# Altium PCB MolkkyPCB_old.PcbDoc
Units mm, origin at the board's own origin, x right, y up, seen from the top; angles counter-clockwise.
Board outline 29.08 x 26.04 mm, 3 copper layers (Top Layer, Internal Plane 13, Bottom Layer); 22 components, 17 nets, 103 pads, 0 vias.
Unrouted connection lines stored in the file: 45.
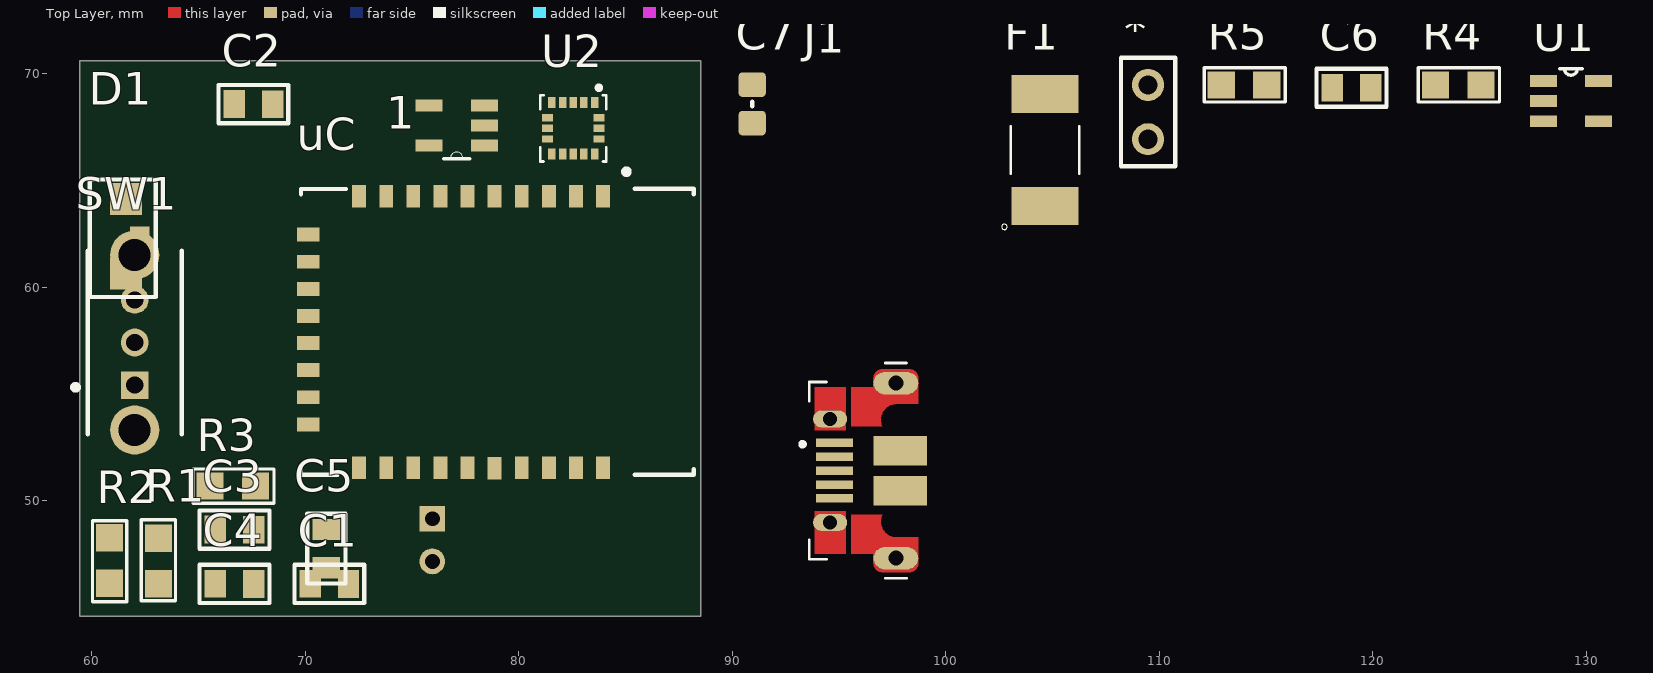
[diagram p0: Top Layer view]
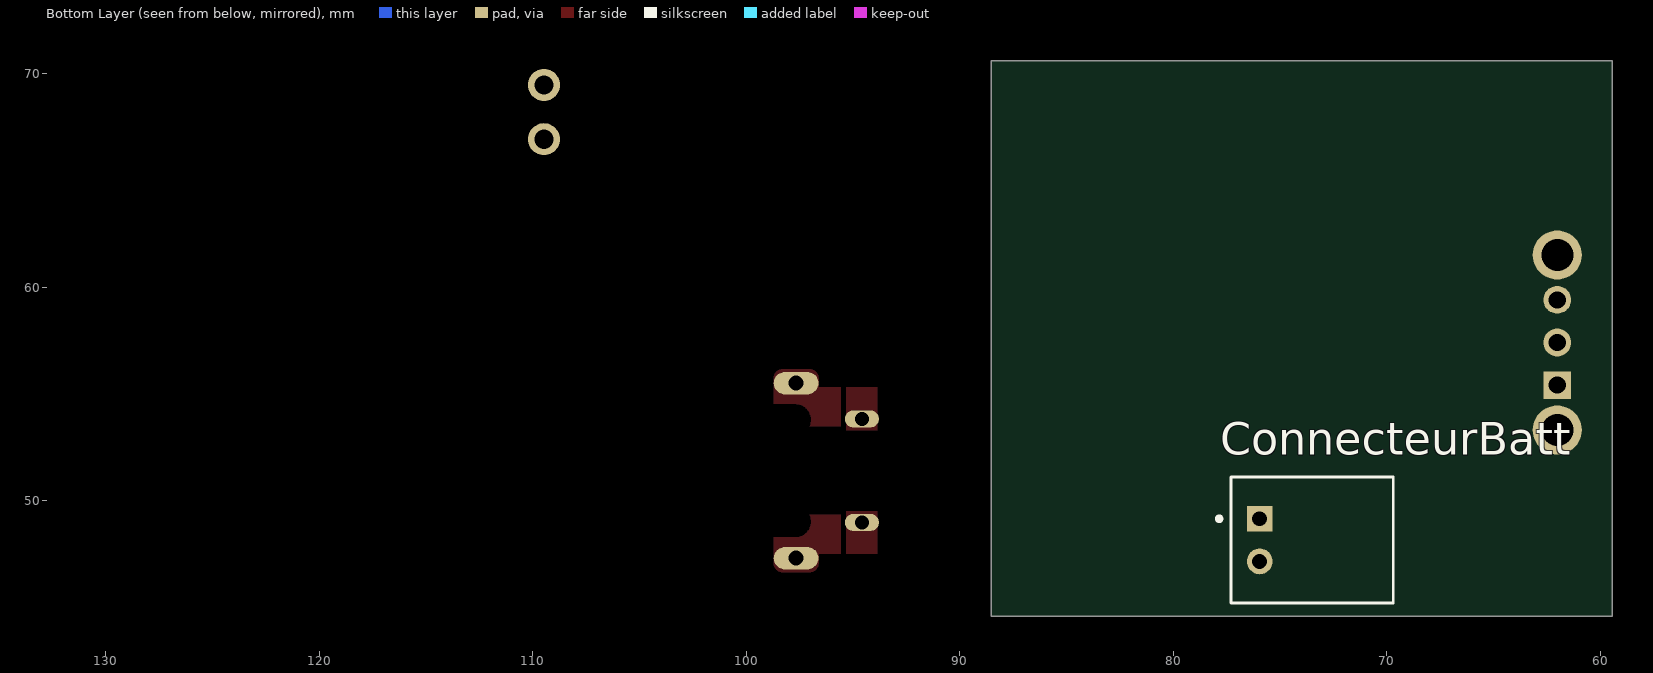
[diagram p1: Bottom Layer view, seen from below]
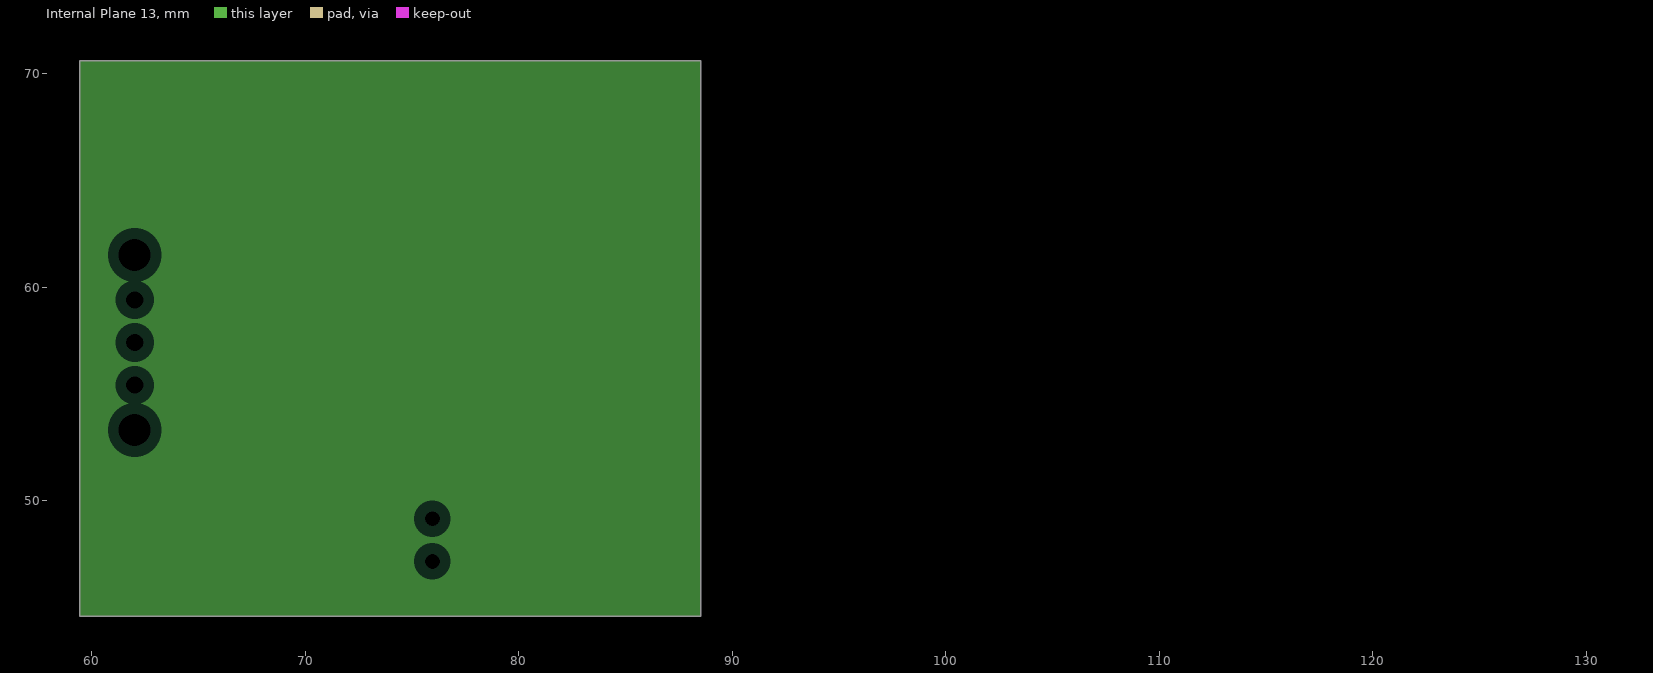
[diagram p2: Internal Plane 13, clearances drawn from the general rule]

## Layer stack, top to bottom
Top Solder: solder mask 0.0102, Solder Resist, Dk 3.5
Top Layer: signal copper 0.0356
Dielectric 1: dielectric 0.32, FR-4, Dk 4.8
Internal Plane 13: plane copper 0.0356
Dielectric2: dielectric 0.32, FR-4, Dk 4.8
Bottom Layer: signal copper 0.0356
Bottom Solder: solder mask 0.0102, Solder Resist, Dk 3.5

## Board outline
59.436,44.577 59.436,70.612 88.519,70.612 88.519,44.577

## Design rules (kind name [scope] priority, off if disabled: settings)
Clearance [All] p1 off: gap=0.254 ignorepadtopadclearanceinfootprint=FALSE except(0: Arc-Hole Track-Hole SMDPad-Hole THPad-Hole Via-Hole Fill-Hole Poly-Hole Region-Hole Text-Hole)
PlaneClearance [All] p1: clearance=0.508
PlaneConnect [All] p1: planeconnectstyle=Relief reliefexpansion=0.508 reliefentries=4 reliefconductorwidth=0.254 reliefairgap=0.254
PolygonConnect [All] p1: connectstyle=Relief reliefconductorwidth=0.254 reliefentries=4 polygonreliefangle="90 Angle" airgapwidth=0.254
RoomDefinition Molkky [InComponentClass('Molkky')] p1: confinementstyle=ConfineIn formatcopy=TRUE lockcomponents=FALSE outline 89.662,45.974 131.445,45.974 131.445,73.025 89.662,73.025
RoutingVias [All] p1: holewidth=0.711 width=1.27 viastyle="Through Hole" minholewidth=0.711 minwidth=1.27 maxholewidth=0.711 maxwidth=1.27
ShortCircuit [All] p1 off: allowed=FALSE
SolderMaskExpansion [All] p1: expansion=0.102
UnRoutedNet [All] p1 off:
UnpouredPolygon [All] p1 off:
Width [All] p1: maxlimit=0.254 minlimit=0.254 preferedwidth=0.254
25 further rules are at their usual default settings.

## Components (designator, comment, footprint, x,y, rotation, side; value= is the part's Value field where it differs from the comment)
1 "MCP73831T-2ACI/OT" *SOT95P280X145-5N#1 77.089,67.564 r180 top
* "ConnecteurCharge" "BARRETTE 2" 109.474,64.389 r90 top
C1 "CMS_0805" CONDENSATEUR_CMS_0805 70.231,46.101 r0 top value=4.7uF
C2 "CMS_0805" CONDENSATEUR_CMS_0805 66.675,68.58 r0 top value=4.7uF
C3 "CMS_0805" CONDENSATEUR_CMS_0805 67.576,48.631 r180 top
C4 "CMS_0805" CONDENSATEUR_CMS_0805 65.786,46.101 r0 top
C5 "CMS_0805" CONDENSATEUR_CMS_0805 70.993,48.641 r270 top value="4.7 uF"
C6 "CMS_0805" CONDENSATEUR_CMS_0805 118.11,69.342 r0 top value="1 uF"
C7 "100n" CAPC2013X100N-0805-NoOverlay 90.932,68.58 r0 top
ConnecteurBatt "S2B-PH-K-S(LF)(SN)" *JST_S2B-PH-K-S(LF)(SN) 75.946,48.149 r90 bottom
D1 "LED_3MM" LED_Angle_droit 61.595,64.135 r0 top
F1 "1812L110PR" *FUSM4632X200N 104.648,66.421 r90 top
J1 "10103592-0001LF" *AMPHENOL_10103592-0001LF_10103592-0001LF(Primary) 97.663,51.399 r90 top
R1 "RESISTANCE_CMS_0805" RESISTANCE_CMS_0805 63.119,46.101 r90 top value=100K
R2 "RESISTANCE_CMS_0805" RESISTANCE_CMS_0805 60.833,48.26 r270 top value=100K
R3 "RESISTANCE_CMS_0805" RESISTANCE_CMS_0805 65.532,50.673 r0 top value=10K
R4 "RESISTANCE_CMS_0805" RESISTANCE_CMS_0805 122.936,69.469 r0 top value=1
R5 "RESISTANCE_CMS_0805" RESISTANCE_CMS_0805 112.903,69.469 r0 top value=2.2K
SW1 "Switch_C&K_OS102011MA1QN1_eec" C&K_OS102011MA1QN1_0 64.008,57.404 r90 top
U1 "TPS76333DBVT" *SOT95P280X145-5N#2 129.286,68.707 r0 top
U2 "LSM6DS33TR" *PQFN50P300X300X86-16N 82.55,67.437 r270 top
uC "NRF52840 kit" uC_NRF52840 34.62,26.035 r270 top

## Footprints (in the part's own frame and the unit in brackets; to place one, negate y for a bottom-side part, rotate by r counter-clockwise, add the part's x,y. Pads: shape width x height; smd on the part's side, far side on the other; paste and mask are expansions set on the pad)
*AMPHENOL_10103592-0001LF_10103592-0001LF(Primary) [mm]
  rect 0.4x1.75 smd: 1(1.3,2.875) 2(0.65,2.875) 3(0,2.875) 4(-0.65,2.875) 5(-1.3,2.875)
  oval 0.8x1.6 hole 0.65: P1(-2.425,3.08) P2(2.425,3.08)
  oval 1.05x2.1 hole 0.7: P3(-4.1,0) P6(4.1,0)
  rect 1.375x2.5 smd: P4(-0.937,-0.2) P5(0.937,-0.2)
  Top Layer region: -3.9,3.81 -2.65,3.81 -2.656,3.807 -2.664,3.801 -2.673,3.794 -2.682,3.788 -2.69,3.781 -2.698,3.774 -2.706,3.767 -2.714,3.76 -2.721,3.752 -2.729,3.744 -2.736,3.736 -2.743,3.728 -2.749,3.72 -2.755,3.711 -2.762,3.702 -2.767,3.693 -2.773,3.684 -2.778,3.675 -2.783,3.666 -2.788,3.656 -2.792,3.646 -2.797,3.636 -2.8,3.626 -2.804,3.616 -2.807,3.606 -2.81,3.596 -2.813,3.586 -2.816,3.575 -2.818,3.565 -2.819,3.554 -2.82,3.55 -2.81,2.59 -2.808,2.584 -2.805,2.573 -2.802,2.563 -2.798,2.553 -2.794,2.543 -2.79,2.533 -2.785,2.523 -2.781,2.514 -2.775,2.504 -2.77,2.495 -2.764,2.486 -2.759,2.477 -2.752,2.468 -2.746,2.459 -2.739,2.451 -2.732,2.443 -2.725,2.435 -2.718,2.427 -2.71,2.419 -2.702,2.412 -2.694,2.405 -2.686,2.398 -2.678,2.391 -2.669,2.385 -2.66,2.379 -2.651,2.373 -2.642,2.367 -2.633,2.362 -2.623,2.357 -2.614,2.352 -2.61,2.35 -3.9,2.35
  Top Layer region: -2.2,3.81 -1.9,3.81 -1.9,2.35 -2.21,2.35 -2.207,2.352 -2.198,2.357 -2.189,2.363 -2.18,2.37 -2.171,2.376 -2.162,2.383 -2.154,2.39 -2.146,2.397 -2.138,2.405 -2.13,2.412 -2.123,2.42 -2.116,2.428 -2.109,2.437 -2.102,2.445 -2.095,2.454 -2.089,2.463 -2.083,2.472 -2.077,2.481 -2.072,2.491 -2.067,2.5 -2.062,2.51 -2.057,2.52 -2.053,2.53 -2.049,2.54 -2.045,2.55 -2.042,2.56 -2.039,2.571 -2.036,2.581 -2.033,2.592 -2.031,2.603 -2.03,2.61 -2.04,3.58 -2.041,3.583 -2.043,3.592 -2.045,3.6 -2.048,3.609 -2.051,3.618 -2.054,3.626 -2.057,3.635 -2.061,3.643 -2.065,3.651 -2.069,3.659 -2.073,3.667 -2.078,3.675 -2.083,3.683 -2.088,3.69 -2.093,3.698 -2.098,3.705 -2.104,3.712 -2.11,3.719 -2.116,3.726 -2.122,3.732 -2.129,3.739 -2.135,3.745 -2.142,3.751 -2.149,3.757 -2.156,3.762 -2.164,3.768 -2.171,3.773 -2.179,3.778 -2.187,3.783 -2.195,3.787 -2.2,3.79
  Top Layer region: 3.9,3.81 2.65,3.81 2.656,3.807 2.664,3.801 2.673,3.794 2.682,3.788 2.69,3.781 2.698,3.774 2.706,3.767 2.714,3.76 2.721,3.752 2.729,3.744 2.736,3.736 2.743,3.728 2.749,3.72 2.755,3.711 2.762,3.702 2.767,3.693 2.773,3.684 2.778,3.675 2.783,3.666 2.788,3.656 2.792,3.646 2.797,3.636 2.8,3.626 2.804,3.616 2.807,3.606 2.81,3.596 2.813,3.586 2.816,3.575 2.818,3.565 2.819,3.554 2.82,3.55 2.81,2.59 2.808,2.584 2.805,2.573 2.802,2.563 2.798,2.553 2.794,2.543 2.79,2.533 2.785,2.523 2.781,2.514 2.775,2.504 2.77,2.495 2.764,2.486 2.759,2.477 2.752,2.468 2.746,2.459 2.739,2.451 2.732,2.443 2.725,2.435 2.718,2.427 2.71,2.419 2.702,2.412 2.694,2.405 2.686,2.398 2.678,2.391 2.669,2.385 2.66,2.379 2.651,2.373 2.642,2.367 2.633,2.362 2.623,2.357 2.614,2.352 2.61,2.35 3.9,2.35
  Top Layer region: 2.2,3.81 1.9,3.81 1.9,2.35 2.21,2.35 2.207,2.352 2.198,2.357 2.189,2.363 2.18,2.37 2.171,2.376 2.162,2.383 2.154,2.39 2.146,2.397 2.138,2.405 2.13,2.412 2.123,2.42 2.116,2.428 2.109,2.437 2.102,2.445 2.095,2.454 2.089,2.463 2.083,2.472 2.077,2.481 2.072,2.491 2.067,2.5 2.062,2.51 2.057,2.52 2.053,2.53 2.049,2.54 2.045,2.55 2.042,2.56 2.039,2.571 2.036,2.581 2.033,2.592 2.031,2.603 2.03,2.61 2.04,3.58 2.041,3.583 2.043,3.592 2.045,3.6 2.048,3.609 2.051,3.618 2.054,3.626 2.057,3.635 2.061,3.643 2.065,3.651 2.069,3.659 2.073,3.667 2.078,3.675 2.083,3.683 2.088,3.69 2.093,3.698 2.098,3.705 2.104,3.712 2.11,3.719 2.116,3.726 2.122,3.732 2.129,3.739 2.135,3.745 2.142,3.751 2.149,3.757 2.156,3.762 2.164,3.768 2.171,3.773 2.179,3.778 2.187,3.783 2.195,3.787 2.2,3.79
  Top Layer region: 2.075,2.1 3.9,2.1 3.9,1.05 4.075,1.05 4.075,1.045 4.058,1.044 4.033,1.042 4.008,1.038 3.983,1.033 3.958,1.026 3.934,1.019 3.91,1.01 3.887,1 3.864,0.989 3.842,0.977 3.82,0.964 3.799,0.95 3.779,0.935 3.759,0.918 3.74,0.901 3.723,0.883 3.706,0.864 3.69,0.844 3.675,0.824 3.661,0.803 3.648,0.781 3.637,0.758 3.626,0.735 3.617,0.712 3.608,0.688 3.601,0.663 3.595,0.639 3.591,0.614 3.587,0.588 3.585,0.563 3.585,0.555 3.58,-0.53 3.58,-0.538 3.581,-0.564 3.584,-0.59 3.588,-0.615 3.593,-0.641 3.599,-0.666 3.607,-0.69 3.615,-0.714 3.625,-0.738 3.636,-0.762 3.649,-0.784 3.662,-0.806 3.676,-0.828 3.692,-0.848 3.708,-0.868 3.726,-0.887 3.744,-0.905 3.763,-0.922 3.783,-0.939 3.804,-0.954 3.825,-0.968 3.848,-0.981 3.87,-0.993 3.894,-1.004 3.918,-1.014 3.942,-1.022 3.967,-1.029 3.992,-1.035 4.017,-1.04 4.043,-1.044 4.06,-1.045 4.06,-1.05 3.125,-1.05 3.125,0 3.123,0.029 3.117,0.076 3.107,0.123 3.095,0.17 3.079,0.215 3.061,0.26 3.04,0.303 3.016,0.345 2.99,0.385 2.961,0.423 2.93,0.46 2.896,0.494 2.86,0.526 2.823,0.556 2.783,0.583 2.742,0.608 2.699,0.63 2.655,0.649 2.61,0.666 2.564,0.679 2.517,0.69 2.47,0.697 2.422,0.702 2.374,0.703 2.326,0.702 2.278,0.697 2.231,0.689 2.184,0.678 2.138,0.665 2.093,0.648 2.075,0.64
  Top Layer region: 4.13,1.05 4.341,1.05 4.363,1.049 4.385,1.047 4.407,1.043 4.428,1.039 4.449,1.033 4.47,1.026 4.491,1.018 4.511,1.009 4.53,0.999 4.55,0.988 4.568,0.976 4.586,0.963 4.603,0.949 4.619,0.935 4.635,0.919 4.649,0.903 4.663,0.886 4.676,0.868 4.688,0.85 4.699,0.83 4.709,0.811 4.718,0.791 4.726,0.77 4.733,0.749 4.739,0.728 4.743,0.707 4.747,0.685 4.749,0.663 4.75,0.641 4.75,-0.641 4.749,-0.663 4.747,-0.685 4.743,-0.707 4.739,-0.728 4.733,-0.749 4.726,-0.77 4.718,-0.791 4.709,-0.811 4.699,-0.83 4.688,-0.85 4.676,-0.868 4.663,-0.886 4.649,-0.903 4.635,-0.919 4.619,-0.935 4.603,-0.949 4.586,-0.963 4.568,-0.976 4.55,-0.988 4.53,-0.999 4.511,-1.009 4.491,-1.018 4.47,-1.026 4.449,-1.033 4.428,-1.039 4.407,-1.043 4.385,-1.047 4.363,-1.049 4.341,-1.05 4.105,-1.05 4.105,-1.045 4.116,-1.045 4.143,-1.044 4.17,-1.041 4.197,-1.037 4.223,-1.031 4.25,-1.024 4.275,-1.015 4.301,-1.006 4.325,-0.995 4.35,-0.982 4.373,-0.969 4.396,-0.954 4.418,-0.938 4.439,-0.921 4.459,-0.903 4.478,-0.884 4.496,-0.864 4.513,-0.843 4.529,-0.821 4.544,-0.798 4.557,-0.775 4.57,-0.75 4.581,-0.726 4.59,-0.7 4.599,-0.675 4.606,-0.648 4.612,-0.622 4.616,-0.595 4.619,-0.568 4.62,-0.541 4.62,-0.525 4.62,0.555 4.62,0.563 4.618,0.588 4.614,0.614 4.61,0.639 4.604,0.663 4.597,0.688 4.588,0.712 4.579,0.735 4.568,0.758 4.557,0.781 4.544,0.803 4.53,0.824 4.515,0.844 4.499,0.864 4.482,0.883 4.465,0.901 4.446,0.918 4.426,0.935 4.406,0.95 4.385,0.964 4.363,0.977 4.341,0.989 4.318,1 4.295,1.01 4.271,1.019 4.247,1.026 4.222,1.033 4.197,1.038 4.172,1.042 4.147,1.044 4.13,1.045
  Top Layer region: -2.075,2.1 -3.9,2.1 -3.9,1.05 -4.075,1.05 -4.075,1.045 -4.058,1.044 -4.033,1.042 -4.008,1.038 -3.983,1.033 -3.958,1.026 -3.934,1.019 -3.91,1.01 -3.887,1 -3.864,0.989 -3.842,0.977 -3.82,0.964 -3.799,0.95 -3.779,0.935 -3.759,0.918 -3.74,0.901 -3.723,0.883 -3.706,0.864 -3.69,0.844 -3.675,0.824 -3.661,0.803 -3.648,0.781 -3.637,0.758 -3.626,0.735 -3.617,0.712 -3.608,0.688 -3.601,0.663 -3.595,0.639 -3.591,0.614 -3.587,0.588 -3.585,0.563 -3.585,0.555 -3.58,-0.53 -3.58,-0.538 -3.581,-0.564 -3.584,-0.59 -3.588,-0.615 -3.593,-0.641 -3.599,-0.666 -3.607,-0.69 -3.615,-0.714 -3.625,-0.738 -3.636,-0.762 -3.649,-0.784 -3.662,-0.806 -3.676,-0.828 -3.692,-0.848 -3.708,-0.868 -3.726,-0.887 -3.744,-0.905 -3.763,-0.922 -3.783,-0.939 -3.804,-0.954 -3.825,-0.968 -3.848,-0.981 -3.87,-0.993 -3.894,-1.004 -3.918,-1.014 -3.942,-1.022 -3.967,-1.029 -3.992,-1.035 -4.017,-1.04 -4.043,-1.044 -4.06,-1.045 -4.06,-1.05 -3.125,-1.05 -3.125,0 -3.123,0.029 -3.117,0.076 -3.107,0.123 -3.095,0.17 -3.079,0.215 -3.061,0.26 -3.04,0.303 -3.016,0.345 -2.99,0.385 -2.961,0.423 -2.93,0.46 -2.896,0.494 -2.86,0.526 -2.823,0.556 -2.783,0.583 -2.742,0.608 -2.699,0.63 -2.655,0.649 -2.61,0.666 -2.564,0.679 -2.517,0.69 -2.47,0.697 -2.422,0.702 -2.374,0.703 -2.326,0.702 -2.278,0.697 -2.231,0.689 -2.184,0.678 -2.138,0.665 -2.093,0.648 -2.075,0.64
  Top Layer region: -4.13,1.05 -4.341,1.05 -4.363,1.049 -4.385,1.047 -4.407,1.043 -4.428,1.039 -4.449,1.033 -4.47,1.026 -4.491,1.018 -4.511,1.009 -4.53,0.999 -4.55,0.988 -4.568,0.976 -4.586,0.963 -4.603,0.949 -4.619,0.935 -4.635,0.919 -4.649,0.903 -4.663,0.886 -4.676,0.868 -4.688,0.85 -4.699,0.83 -4.709,0.811 -4.718,0.791 -4.726,0.77 -4.733,0.749 -4.739,0.728 -4.743,0.707 -4.747,0.685 -4.749,0.663 -4.75,0.641 -4.75,-0.641 -4.749,-0.663 -4.747,-0.685 -4.743,-0.707 -4.739,-0.728 -4.733,-0.749 -4.726,-0.77 -4.718,-0.791 -4.709,-0.811 -4.699,-0.83 -4.688,-0.85 -4.676,-0.868 -4.663,-0.886 -4.649,-0.903 -4.635,-0.919 -4.619,-0.935 -4.603,-0.949 -4.586,-0.963 -4.568,-0.976 -4.55,-0.988 -4.53,-0.999 -4.511,-1.009 -4.491,-1.018 -4.47,-1.026 -4.449,-1.033 -4.428,-1.039 -4.407,-1.043 -4.385,-1.047 -4.363,-1.049 -4.341,-1.05 -4.105,-1.05 -4.105,-1.045 -4.116,-1.045 -4.143,-1.044 -4.17,-1.041 -4.197,-1.037 -4.223,-1.031 -4.25,-1.024 -4.275,-1.015 -4.301,-1.006 -4.325,-0.995 -4.35,-0.982 -4.373,-0.969 -4.396,-0.954 -4.418,-0.938 -4.439,-0.921 -4.459,-0.903 -4.478,-0.884 -4.496,-0.864 -4.513,-0.843 -4.529,-0.821 -4.544,-0.798 -4.557,-0.775 -4.57,-0.75 -4.581,-0.726 -4.59,-0.7 -4.599,-0.675 -4.606,-0.648 -4.612,-0.622 -4.616,-0.595 -4.619,-0.568 -4.62,-0.541 -4.62,-0.525 -4.62,0.555 -4.62,0.563 -4.618,0.588 -4.614,0.614 -4.61,0.639 -4.604,0.663 -4.597,0.688 -4.588,0.712 -4.579,0.735 -4.568,0.758 -4.557,0.781 -4.544,0.803 -4.53,0.824 -4.515,0.844 -4.499,0.864 -4.482,0.883 -4.465,0.901 -4.446,0.918 -4.426,0.935 -4.406,0.95 -4.385,0.964 -4.363,0.977 -4.341,0.989 -4.318,1 -4.295,1.01 -4.271,1.019 -4.247,1.026 -4.222,1.033 -4.197,1.038 -4.172,1.042 -4.147,1.044 -4.13,1.045
  silkscreen extent -5.04,-0.5 5.04,4.47
*FUSM4632X200N [mm]
  rect 1.78x3.15 smd: 1(-2.615,0) 2(2.615,0)
  silkscreen extent -3.73,-1.6 1.1,2.03
*JST_S2B-PH-K-S(LF)(SN) [mm]
  rect 1.208x1.208 hole 0.7: 1(1,0)
  round 1.208 hole 0.7: 2(-1,0)
  silkscreen extent -2.95,-6.25 2.95,2
*PQFN50P300X300X86-16N [mm]
  rect 0.51x0.35 smd: 1(-1.21,1) 2(-1.21,0.5) 3(-1.21,0) 4(-1.21,-0.5) 5(-1.21,-1) 9(1.21,-1) 10(1.21,-0.5) 11(1.21,0) 12(1.21,0.5) 13(1.21,1)
  rect 0.35x0.51 smd: 6(-0.5,-1.21) 7(0,-1.21) 8(0.5,-1.21) 14(0.5,1.21) 15(0,1.21) 16(-0.5,1.21)
  silkscreen extent -2,-1.55 1.55,1.55
*SOT95P280X145-5N#1 [mil]
  rect 50x22 smd: 1(-51,37) 2(-51,0) 3(-51,-37) 4(51,-37) 5(51,37)
  silkscreen extent -24,49 24,61
*SOT95P280X145-5N#2 [mil]
  rect 50x22 smd: 1(-51,37) 2(-51,0) 3(-51,-37) 4(51,-37) 5(51,37)
  Internal Plane 13 lines w0: -59,-47 -59,-28 ; -59,-47 -34,-47 ; -59,-47 -59,-28 ; -59,-47 -34,-47 ; -59,-28 -34,-28 ; -59,-28 -34,-28 ; -59,-10 -59,10 ; -59,-10 -34,-10 ; -59,-10 -59,10 ; -59,-10 -34,-10 ; -59,10 -34,10 ; -59,10 -34,10 ; -59,28 -59,47 ; -59,28 -34,28 ; -59,28 -59,47 ; -59,28 -34,28 ; -59,47 -34,47 ; -59,47 -34,47 ; -34,-60 34,-60 ; -34,-60 -34,-47 ; -34,-60 34,-60 ; -34,-60 -34,-47 ; -34,-47 -34,-28 ; -34,-47 -34,-28 ; -34,-28 -34,-10 ; -34,-28 -34,-10 ; -34,-10 -34,10 ; -34,-10 -34,10 ; -34,10 -34,28 ; -34,10 -34,28 ; -34,28 -34,47 ; -34,28 -34,47 ; -34,47 -34,60 ; -34,47 -34,60 ; -34,60 -12,60 ; -34,60 -12,60 ; -12,60 ccw(c0,60) 12,60 ; -12,60 ccw(c0,60) 12,60 ; -12,60 12,60 ; -12,60 12,60 ; 12,60 34,60 ; 12,60 34,60 ; 34,-60 34,-47 ; 34,-60 34,-47 ; 34,-47 34,-28 ; 34,-47 59,-47 ; 34,-47 34,-28 ; 34,-47 59,-47 ; 34,-28 34,28 ; 34,-28 59,-28 ; 34,-28 34,28 ; 34,-28 59,-28 ; 34,28 34,47 ; 34,28 59,28 ; 34,28 34,47 ; 34,28 59,28 ; 34,47 34,60 ; 34,47 59,47 ; 34,47 34,60 ; 34,47 59,47 ; 59,-47 59,-28 ; 59,-47 59,-28 ; 59,28 59,47 ; 59,28 59,47
  silkscreen extent -21,48 21,60
"BARRETTE 2" [mm] "BARRETTE 3 CONTACTS ; 1 RANGEE ; DROITE ; MALE ; ESPACEMENT BROCHES = 2.54 mm"
  round 1.5 hole 0.9: 1(2.54,0) 2(5.08,0)
  silkscreen extent 1.27,-1.27 6.35,1.27
C&K_OS102011MA1QN1_0 [mm]
  rect 1.3x1.3 hole 0.8 paste-1000 mask+0: 1(-2,2)
  round 1.3 hole 0.8 paste-1000 mask+0: 2(0,2) 3(2,2)
  round 2.3 hole 1.5 paste-1000 mask+0: 4(-4.1,2) 5(4.1,2)
  silkscreen extent -4.3,-0.2 4.3,4.9, body extent -5.35,-4.3 5.35,4.3, height 0.25
CAPC2013X100N-0805-NoOverlay [mm] "Capacitor,non-polarized,Chip;2.00mm L X 1.25mm W X 1.00mm H"
  rrect30% 1.27x1.15 smd: 1(0,0.9) 2(0,-0.9)
  silkscreen extent 0,-0.1 0,0.1, body extent -0.62,-1 0.63,1, height 0.6
CONDENSATEUR_CMS_0805 [mm] "CONDENSATEUR CMS 0805 ; DIMENSIONS : 2mm x 1.25mm"
  rect 1x1.3 smd: 1(0,0) 2(1.79,-0.01)
  silkscreen extent -0.74,-0.9 2.53,0.89, body extent -0.09,-0.67 1.91,0.64, height 0.73
LED_Angle_droit [mm] "LED CMS 0805 ; DIMENSIONS : 2.0mm x 0.9mm"
  rect 1.5x1.5 smd: 1(0,-3.5) 2(0,0)
  rect 0.9x0.9 smd: 1(0.65,-1.75)
  silkscreen extent -1.7,-4.6 1.4,0.9, body extent -1.5,-3.35 2.7,-0.25, height 2
RESISTANCE_CMS_0805 [mil] "RESISTANCE CMS 0805 ; DIMENSIONS : 2mm x 1.25mm"
  rect 50x50 smd: 1(0,0) 2(84,0)
  silkscreen extent -31,-31 118,31, body extent 4,-24 83,26, height 31
uC_NRF52840 [mm] "QFN, 40-Leads, Body 13,05x18,05mm, Pitch 1,27mm, Thermal Pad 8,90x8,90mm, IPC Medium Density"
  rect 1.05x0.65 smd: 1(-38.227,49.327) 2(-38.227,48.057) 3(-38.227,46.787) 4(-38.227,45.517) 5(-38.227,44.247) 6(-38.227,42.977) 7(-38.227,41.707) 8(-38.227,40.437) 9(-38.227,39.167) 10(-38.227,37.897) 21(-25.502,37.897) 22(-25.502,39.167) 23(-25.502,40.437) 24(-25.5,41.708) 25(-25.502,42.977) 26(-25.476,44.247) 27(-25.502,45.517) 28(-25.502,46.787) 29(-25.502,48.057) 30(-25.502,49.327)
  rect 0.65x1.05 smd: 11(-36.424,35.509) 12(-35.154,35.509) 13(-33.884,35.509) 14(-32.614,35.509) 15(-31.344,35.509) 16(-30.074,35.509) 17(-28.804,35.509) 18(-27.534,35.509)
  silkscreen extent -39.49,35.17 -25.18,53.57, body extent -38.43,35.31 -25.6,53.29, height 3.1

## Part data
1: "MCP73831 Series Single-Cell Li-Ion/Li-Polymer Battery Charge Controller SOT-23-5", Package="SOT-23 Microchip", Availability=Unavailable, MF=Microchip, MP=MCP73831T-2ACI/OT, Price=None, SnapEDA_Link=https://www.snapeda.com/parts/MCP73831T-2ACI/OT/Microchip/view-part/?ref=snap
*: library part "Barrette 2"
C1 C2 C3 C4 C5 C6: library part CONDENSATEUR_CMS_CER_0805, "CONDENSATEUR CMS CERAMIQUE 0805"
  C3 C4: 100=100nF
C7: library part 0100000001868, Manufacturer=Yageo, Manufacturer Part Number=CC0805KRX7R9BB104, Package Case=0805, Recommended Rating=Platinum, Temperature Coefficient=X7R, Tolerance=10%, Voltage Rated=50, Assembly=SMD, Barcode=0100000001868, Capacitance=100n, Category=Capacitors, Family="CERAMIC CAPACITOR", id=136, item_id=450, Part Type=Capacitors
ConnecteurBatt: "PH Series 2 Position 2.0 mm Through Hole Side Entry Shrouded Header", Package=None, Availability=Unavailable, MF="JST Sales", MP=S2B-PH-K-S_LF__SN_, Price=None, SnapEDA_Link=https://www.snapeda.com/parts/S2B-PH-K-S%28LF%29%28SN%29/JST%20Sales%20America%20Inc./view-part/?ref=snap
D1: library part "LED Angle droit", "LED Angle droit - ROUGE", Type=LED_Angle_droit
F1: "PTC Resettable Fuse 1.1A_hold_ 2.2A_trip_ 6VDC 100A 0.8W 0.3s 0.04Ohm SMD Solder Pad 1812 T/R", Package="1812 Littelfuse", Availability=Unavailable, MF="Littelfuse Inc.", MP=1812L110PR, Price=None, SnapEDA_Link=https://www.snapeda.com/parts/1812L110PR/Littelfuse%20Inc./view-part/?ref=snap
J1: "Micro Usb, 2.0 Type b, Rcpt, Smt", Package=None, Availability=Unavailable, MF="Amphenol ICC", MP=10103592-0001LF, Price=None, SnapEDA_Link=https://www.snapeda.com/parts/10103592-0001LF/Amphenol%20ICC/view-part/?ref=snap
R1 R2 R3 R4 R5: "RESISTANCE CMS 0805", Type=CMS_0805
SW1: "SWITCH SLIDE SPDT 100MA 12V", Digikey Part Number=CKN9559-ND, Manufacturer=C&K, Mouser Part Number=OS102011MA1QN1, Package=SW_SLIDE, Temperature="-30°C to +70°C", Temperature Range High=+70°C, Temperature Range Low=-30°C, ComponentLink1Description=Upverter, ComponentLink1URL=https://upverter.com/upn/revision/2b2ed0fd4d150582/, ComponentLink2Description=Datasheet, ComponentLink2URL=https://www.ckswitches.com/media/1428/os.pdf, Digikey Description="SWITCH SLIDE SPDT 100MA 12V", helpURL=https://upverter.com/upn/revision/2b2ed0fd4d150582/, Lead Free=yes, Part Number=OS102011MA1QN1, Price=0.290275964971, RoHS=TRUE, Supplier 1=Digi-Key, Supplier 2=Mouser, Supplier Part Number 1=CKN9559-ND, Supplier Part Number 2=OS102011MA1QN1
U1: "LDO voltage regulator [Texas Instruments] TPS76333DBVT LDO voltage regulator", Package="SOT-23-5 Texas Instruments", Availability=Unavailable, MF="Texas Instruments", MP=TPS76333DBVT, Price=None, SnapEDA_Link=https://www.snapeda.com/parts/TPS76333DBVT/Texas%20Instruments/view-part/?ref=snap
U2: "Integrated Circuit, Misc s 3d Accelerometer And Gyro Lsm6ds3", Package="LGA-16 STMicroelectronics", Availability=Unavailable, MF=STMicroelectronics, MP=LSM6DS33TR, Price=None, SnapEDA_Link=https://www.snapeda.com/parts/LSM6DS33TR/STMicroelectronics/view-part/?ref=snap
uC: Supplier Part Number 1=NRF52840-QIAA-R, Supplier 1=TME

## Nets (pads, with @x,y where several pads share a name; then routed paths per layer and width w, separated by ;. In a path a pad name is that pad's centre, name@x,y a point inside that pad or via, vN(x,y) a via of type N, cw(c..) or ccw(c..) an arc to the next point about the centre after c; other vN are vias at no path point)
3v3: 1.3 C1.2 C7.2 ConnecteurBatt.2 J1.1 R2.2 SW1.3
CS: U2.5 uC.14
GND: 1.2 *.1 C1.1 C2.1 C3.1 C4.2 C6.2 C7.1 ConnecteurBatt.1 D1.2 J1.5 R1.1 R3.2 R4.1 U1.2 uC.5 uC.16
LED: R5.2 uC.4
Net1_4: 1.4 F1.2
Net1_5: 1.5 R3.1
Net*_2: *.2 C2.2 F1.1
NetC5_2: C5.2 R4.2
NetD1_1: D1.1 R5.1
SCL: U2.2 uC.2
SDA: U2.3 uC.6
SDO: U2.4 uC.25
SWCLK: J1.2 uC.28
SWD: J1.3 uC.27
Tbatt: R1.2 R2.1 uC.3
VCC: C6.1 SW1.2 U1.1 U1.3
VCC33: C3.2 C4.1 C5.1 U1.5 uC.15
pads on no net: 1.1 J1.4 J1.P1 J1.P2 J1.P3 J1.P4 J1.P5 J1.P6 SW1.1 SW1.4 SW1.5 U1.4 U2.1 U2.6 U2.7 U2.8 U2.9 U2.10 U2.11 U2.12 U2.13 U2.14 U2.15 U2.16 uC.1 uC.7 uC.8 uC.9 uC.10 uC.11 uC.12 uC.13 uC.17 uC.18 uC.21 uC.22 uC.23 uC.24 uC.26 uC.29 uC.30

## Polygon pours and split planes (outlines as drawn)
no net on Internal Plane 13 (split plane): 88.519,44.577 59.436,44.577 59.436,70.612 88.519,70.612

## Text inside footprints (layer, text, board x,y; h text height)
J1: Mechanical 13 "PCB EDGE" at 99.526,57.268 h1.88 r90; Mechanical 13 "PCB EDGE" at 99.526,57.268 h1.88 r90